# Altium PCB SmartSocket V1.0.PcbDoc (part 1 of 4)
Units mm, origin at the board's own origin, x right, y up, seen from the top; angles counter-clockwise.
Board outline 49.2 x 69.88 mm, 2 copper layers (Top Layer, Bottom Layer), stack 1.671 mm thick; 117 components, 80 nets, 371 pads, 48 vias.
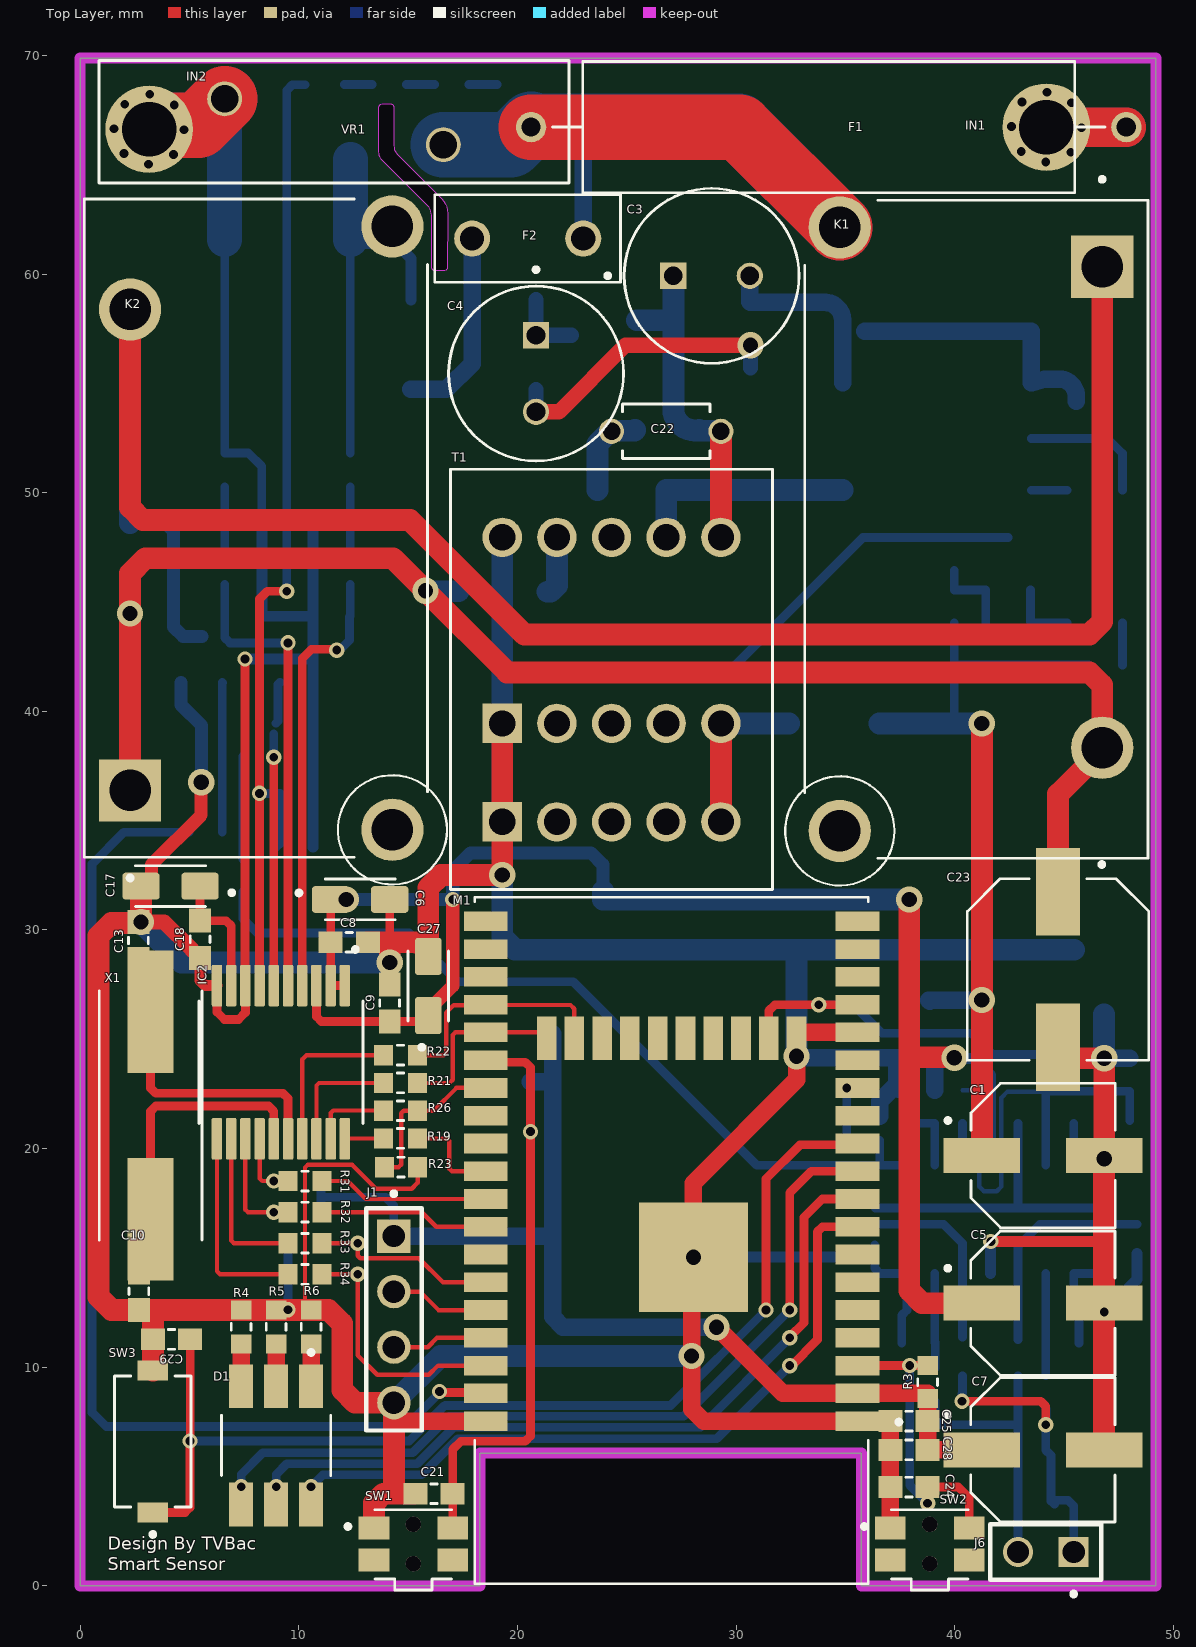
[diagram p0: Top Layer view]
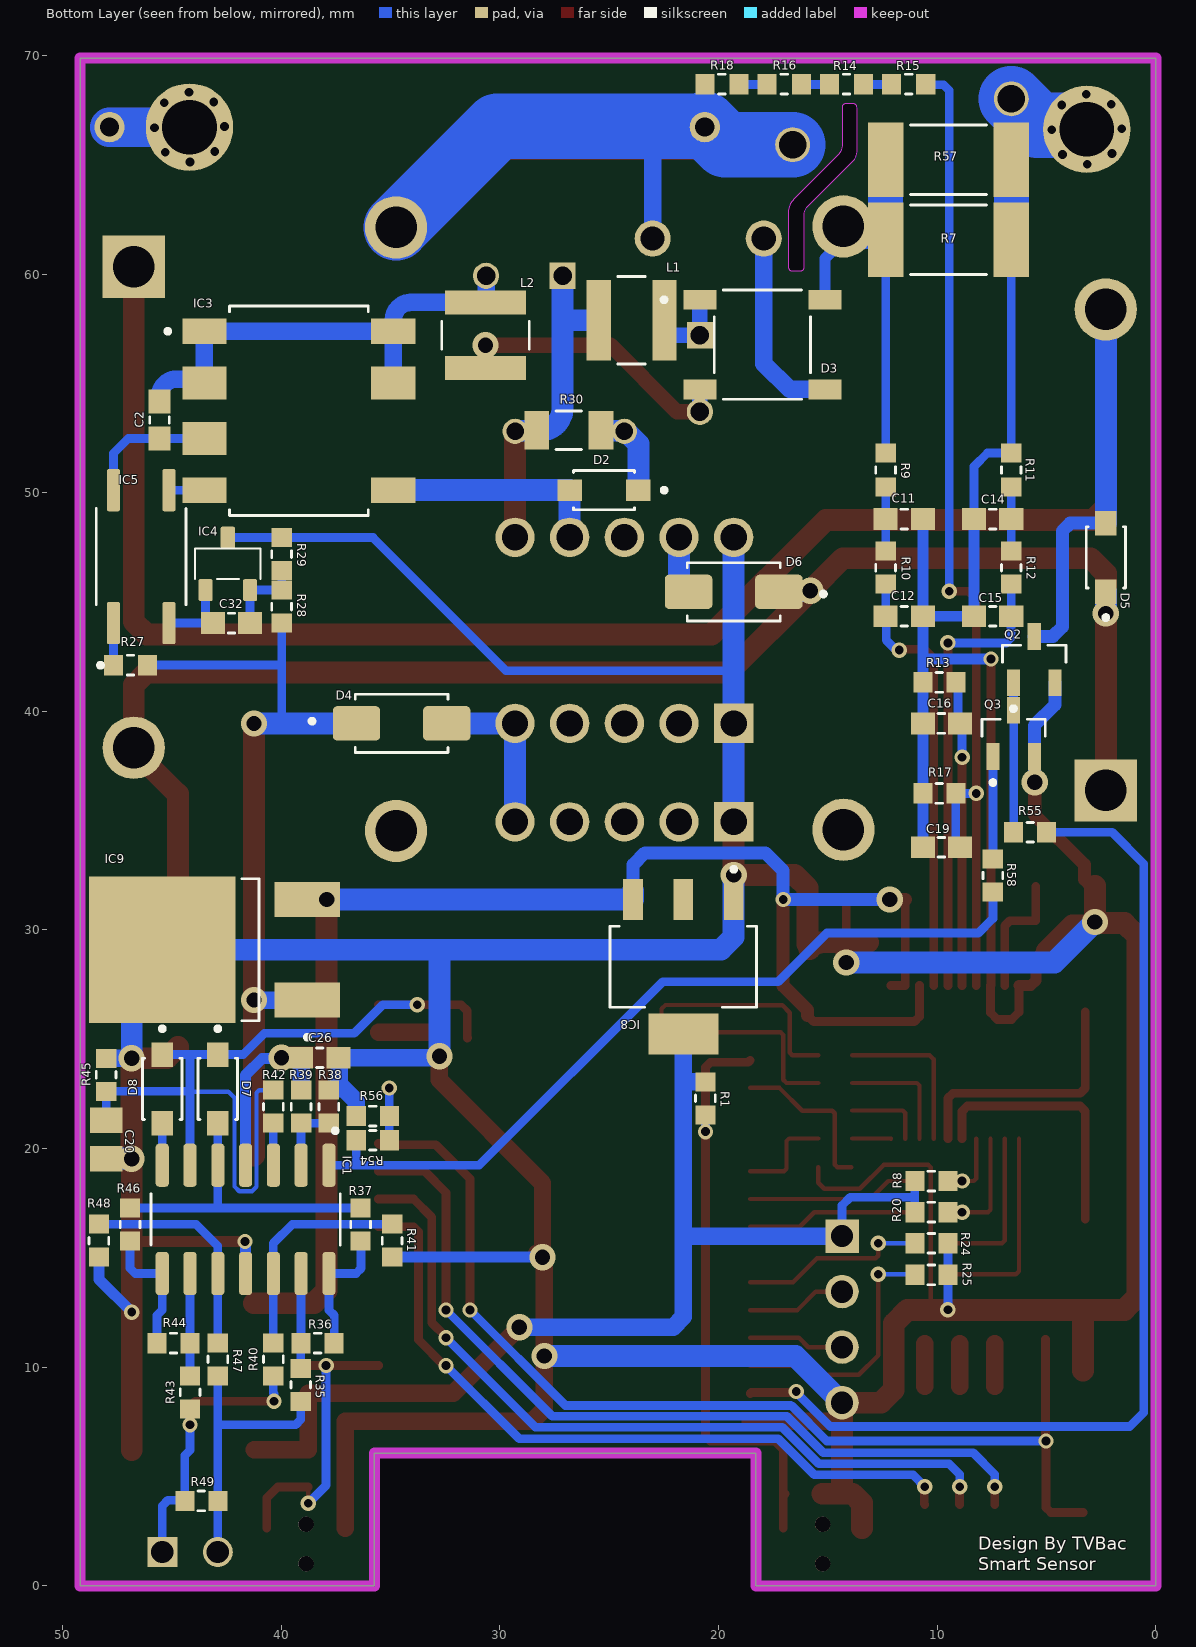
[diagram p1: Bottom Layer view, seen from below]

## Layer stack, top to bottom
Top Solder: solder mask 0.0102, Solder Resist, Dk 3.5
Top Layer: signal copper 0.0356
Dielectric 1: dielectric 1.6, FR-4, Dk 4.8
Bottom Layer: signal copper 0.0356
Bottom Solder: solder mask 0.0102, Solder Resist, Dk 3.5

## Board outline
0,0 0,69.875 49.2,69.875 49.2,0 35.738,0 35.738,6.071 18.288,6.071 18.288,0
cut-out: 13.843,67.793 14.173,67.793 cw(c14.173,67.615) 14.351,67.615 14.351,65.862 ccw(c14.903,65.862) 14.513,65.472 16.535,63.449 cw(c15.861,62.775) 16.815,62.775 16.815,62.687 16.806,62.678 cw(c16.637,60.316) 16.637,60.147 16.256,60.147 cw(c16.256,60.325) 16.078,60.325 16.078,62.687 ccw(c15.465,62.687) 15.899,63.121 13.827,65.193 cw(c14.217,65.583) 13.665,65.583 13.665,67.615 cw(c13.843,67.615)

## Design rules (kind name [scope] priority, off if disabled: settings)
Clearance [All] p1: gap=0.1 ignorepadtopadclearanceinfootprint=FALSE
ComponentClearance [All] p1: gap=0.1 collisioncheckmode=3 verticalgap=0.1 showdistances=FALSE
DiffPairsRouting [All] p1: maxlimit=0.2 minlimit=0.1 mostfreqgap=0.2 toplayer_minwidth=0.2 toplayer_maxwidth=1 toplayer_prefwidth=0.2 bottomlayer_minwidth=0.2 bottomlayer_maxwidth=1 bottomlayer_prefwidth=0.2 maxuncoupledlength=12.7
Height [All] p1: minheight=0 maxheight=40 prefheight=10
HoleToHoleClearance [InDrillLayerPair('Top Layer - Bottom Layer') vs InDrillLayerPair('Top Layer - Bottom Layer')] p1: gap=0.1 allowstackedmicrovias=TRUE
MinimumSolderMaskSliver [OnLayer('Top Layer') vs OnLayer('Bottom Layer')] p1: minsoldermaskwidth=0.1
PlaneConnect [All] p1: planeconnectstyle=Direct reliefexpansion=0.508 reliefentries=4 reliefconductorwidth=0.254 reliefairgap=0.254
PolygonConnect [All] p1: connectstyle=Direct reliefconductorwidth=0.254 reliefentries=4 polygonreliefangle="90 Angle" airgapwidth=0.254
RoutingVias [All] p1: holewidth=0.4 width=0.7 viastyle="Through Hole" minholewidth=0.4 minwidth=0.7 maxholewidth=3 maxwidth=4
SilkToSilkClearance [OnLayer('Top Overlay') vs OnLayer('Bottom Overlay')] p1: silktosilkclearance=0
SilkToSolderMaskClearance [OnLayer('Top Layer') vs OnLayer('Bottom Layer')] p1: minsilkscreentomaskgap=0.1 clearancetoexposedcopper=TRUE
SolderMaskExpansion [All] p1: expansion=0.102 istentingtop=FALSE
Width [All] p1: maxlimit=5 minlimit=0.15 preferedwidth=0.2
22 further rules are at their usual default settings.

## Classes and differential pairs
net class LV-HP: 3V3-ESP +5 NetC1_1 NetD4_2 NetIC8_2 NetU1_2 NetU1_3 NetU1_4 POWER_L
net class HV-HP: +12 CUR-SHT-1 NetC2_1 NetC22_1 NetD2_A NetD3_AC2 NetD5_A NetD6_2 NetF1_1 NetIC3_4 NetK1_NC NetK2_NC NetU1_8 POWER-300V POWER-300V-R POWER-GND POWER-GND-R POWER_L POWER_N
net class Analog: +5 CUR-SHT-1 NetC11_2 NetC12_2 NetC14_2 NetC15_2 NetC16_2 NetC17_1 NetC17_2 NetC19_2 NetR14_1 NetR14_2 NetR16_2 POWER_L POWER_N

## Components (designator, comment, footprint, x,y, rotation, side; value= is the part's Value field where it differs from the comment)
C1 "220 µF 16 V Aluminum - Polymer Capacitors Radial, Can - SMD 22mOhm 1000 Hrs @ 125°C" SMD-DxLxW-6.3x6.6x6.6-PEC 44.044,19.685 r0 top value=220uF
C2 "0.1 µF ±5% 50V Ceramic Capacitor X7R 0603 (1608 Metric)" SMD-CAP-0603-YAGEO 45.568,53.326 r90 bottom value=0.1uF
C3 "2.2 µF 400 V Aluminum Electrolytic Capacitors Radial, Can 2000 Hrs @ 85°C" TH-CAP-HxD-12.5x8.0-PEC 28.882,59.919 r0 top value=2.2uF
C4 "2.2 µF 400 V Aluminum Electrolytic Capacitors Radial, Can 2000 Hrs @ 85°C" TH-CAP-HxD-12.5x8.0-PEC 20.853,55.448 r270 top value=2.2uF
C5 "220 µF 16 V Aluminum - Polymer Capacitors Radial, Can - SMD 22mOhm 1000 Hrs @ 125°C" SMD-DxLxW-6.3x6.6x6.6-PEC 44.038,12.929 r0 top value=220uF
C6 "10 µF Molded Tantalum Capacitors 10 V 1206 (3216 Metric) 3.8Ohm" SMD-CAP-TAN-1206-KEMET 12.81,31.394 r0 top
C7 "220 µF 10 V Aluminum - Polymer Capacitors Radial, Can - SMD 20mOhm 2000 Hrs @ 105°C" SMD-DxLxW-6.3x6.6x6.6-PEC 44.038,6.223 r0 top value=220uF
C8 "0.1 µF ±10% 16V Ceramic Capacitor X7R 0603 (1608 Metric)" SMD-CAP-0603-YAGEO 12.31,29.439 r180 top value=0.1uF
C9 "0.1 µF ±10% 16V Ceramic Capacitor X7R 0603 (1608 Metric)" SMD-CAP-0603-YAGEO 14.16,26.658 r270 top value=0.1uF
C10 "22 pF ±1% 50V Ceramic Capacitor C0G, NP0 0603 (1608 Metric)" SMD-CAP-0603-YAGEO 2.692,13.476 r270 top value=22pF
C11 "0.033 µF ±5% 16V Ceramic Capacitor X7R 0603 (1608 Metric)" SMD-CAP-0603-KEMET 11.508,48.793 r0 bottom value=33nF
C12 "0.033 µF ±5% 16V Ceramic Capacitor X7R 0603 (1608 Metric)" SMD-CAP-0603-KEMET 11.508,44.348 r0 bottom value=33nF
C13 "22 pF ±1% 50V Ceramic Capacitor C0G, NP0 0603 (1608 Metric)" SMD-CAP-0603-YAGEO 2.667,29.515 r270 top value=22pF
C14 "0.033 µF ±5% 16V Ceramic Capacitor X7R 0603 (1608 Metric)" SMD-CAP-0603-KEMET 7.462,48.793 r180 bottom value=33nF
C15 "0.033 µF ±5% 16V Ceramic Capacitor X7R 0603 (1608 Metric)" SMD-CAP-0603-KEMET 7.462,44.348 r180 bottom value=33nF
C16 "0.033 µF ±5% 16V Ceramic Capacitor X7R 0603 (1608 Metric)" SMD-CAP-0603-KEMET 9.808,39.448 r180 bottom value=33nF
C17 "10 µF Molded Tantalum Capacitors 10 V 1206 (3216 Metric) 3.8Ohm" SMD-CAP-TAN-1206-KEMET 4.136,32.004 r180 top
C18 "0.1 µF ±10% 16V Ceramic Capacitor X7R 0603 (1608 Metric)" SMD-CAP-0603-YAGEO 5.486,29.575 r90 top value=0.1uF
C19 "0.033 µF ±5% 16V Ceramic Capacitor X7R 0603 (1608 Metric)" SMD-CAP-0603-KEMET 9.808,33.782 r180 bottom value=33nF
C20 "10 µF ±10% 6.3V Ceramic Capacitor X5R 0805 (2012 Metric)" SMD-CAP-0805-KEMET 48.006,20.415 r90 bottom value=10uF
C21 "0.1 µF ±5% 25V Ceramic Capacitor X7R 0603 (1608 Metric)" SMD-CAP-0603-YAGEO 16.19,4.216 r0 top value=0.1uF
C22 "1000 pF ±5% 50V Ceramic Capacitor C0G, NP0 Radial" TH-CAP-HxLxW-5.5x4.0x2.5-TDKC 26.808,52.807 r0 top value=1nF
C23 "220 µF 25 V Aluminum - Polymer Capacitors Radial, Can - SMD 27mOhm 10000 Hrs @ 105°C" SMD-DxLxW-8.0x8.3x8.3-PEC 44.729,28.194 r270 top value=220uF
C24 "0.1 µF ±5% 25V Ceramic Capacitor X7R 0603 (1608 Metric)" SMD-CAP-0603-YAGEO 37.912,4.521 r0 top value=0.1uF
C25 "0.1 µF ±10% 10V Ceramic Capacitor X7R 0603 (1608 Metric)" SMD-CAP-0603-YAGEO 37.912,7.534 r0 top value=0.01uF
C26 "0.1 µF ±10% 10V Ceramic Capacitor X7R 0603 (1608 Metric)" SMD-CAP-0603-YAGEO 38.241,24.155 r0 bottom value=0.01uF
C27 "10 µF Molded Tantalum Capacitors 10 V 1206 (3216 Metric) 3.8Ohm" SMD-CAP-TAN-1206-KEMET 15.926,27.437 r90 top
C28 "1 µF ±10% 16V Ceramic Capacitor X7R 0603 (1608 Metric)" SMD-CAP-0603-YAGEO 37.912,6.223 r0 top value=1uF
C29 "0.1 µF ±5% 25V Ceramic Capacitor X7R 0603 (1608 Metric)" SMD-CAP-0603-YAGEO 4.177,11.278 r0 top value=0.1uF
C32 "10000 pF ±5% 25V Ceramic Capacitor X7R 0603 (1608 Metric)" SMD-CAP-0603-YAGEO 42.273,44.034 r180 bottom value=0.01uF
D1 "Red, Green, Blue (RGB) 625nm Red, 525nm Green, 568nm Blue LED Indication - Discrete 2V Red, 3.2V Green, 3.3V Blue 6-SMD, J-Lead" SMD-HxLxW-1.6x5.0x5.0-ABOC 8.966,6.426 r270 top
D2 "Diode 1000 V 1A Surface Mount SOD-123FL" SOD-123FL-SMCDS 25.238,50.114 r0 bottom value=6pF
D3 "Bridge Rectifier Single Phase Standard 1 kV Surface Mount ABS" DIODE-SMD-4-TSC 17.993,56.769 r180 bottom
D4 "Diode 40 V 3A Surface Mount DO-214AC (SMA)" SMD-DO-214AC-214-CT 34.493,39.448 r180 bottom
D5 "Diode 1000 V 1A Surface Mount SOD-123FL" SOD-123FL-SMCDS 2.286,47.036 r90 bottom value=6pF
D6 "Diode 40 V 3A Surface Mount DO-214AC (SMA)" SMD-DO-214AC-214-CT 19.304,45.466 r0 bottom
D7 "Diode 1000 V 1A Surface Mount SOD-123FL" SOD-123FL-SMCDS 42.901,22.733 r270 bottom value=6pF
D8 "Diode 1000 V 1A Surface Mount SOD-123FL" SOD-123FL-SMCDS 45.441,22.733 r270 bottom value=6pF
F1 "20 A 600 V AC 500 V DC Fuse Cartridge, Ceramic Through Hole 5mm x 20mm (Axial)" FUSE-5mmx20mm-AXIAL-BFI 34.239,66.718 r180 top value=20A
F2 "1 A 300 V AC DC Fuse Board Mount (Cartridge Style Excluded) Through Hole Radial, Box" FUSE-HxLxW-8.0x8.5x4.0-LI 20.472,61.62 r180 top value=1A
IC1 "General Purpose Amplifier 4 Circuit 14-SOIC" SOIC-14 41.631,16.764 r270 bottom
IC2 "Single Phase Meter IC 20-SSOP" SSOP-20-ADI 9.185,23.952 r270 top
IC3 "Converter Offline Flyback Topology 132kHz SMD-8B" SMD-8B-PI 39.192,53.746 r180 bottom
IC4 "Shunt Voltage Reference IC Adjustable 2.495V 36 VV ±1% 100 mA SOT-23-3" SOT-23-3-DS 42.443,46.744 r90 bottom
IC5 "Optoisolator Transistor Output 3750Vrms 1 Channel 4-SOP (2.54mm)" SOP-4 46.406,47.074 r90 bottom
IC8 "Linear Voltage Regulator IC Positive Fixed 1 Output 1A SOT-223-3" SOT-223-3-DI 21.608,28.319 r270 bottom
IC9 "Linear Voltage Regulator IC Positive Fixed 1 Output 1A TO-252" TO252-3-RS 43.053,29.094 r0 bottom
IN1 "INPUT" INPUT-2.0x3.5 44.196,66.718 r0 top
IN2 "INPUT" INPUT-2.0x3.5 3.156,66.62 r0 top
J1 "Connector Header Through Hole 4 position 0.100\" (2.54mm)" HEADER-2.54-4 14.351,12.188 r270 top
J6 "Connector Header Through Hole 2 position" HEADER-2.54-2 44.171,1.549 r0 top
K1 "General Purpose Relay SPST-NO (1 Form A) 12VDC Coil Through Hole" RELAY-HxLxW-23.5x30.5x15.7-OEIEMCD-D 40.997,48.328 r90 top
K2 "General Purpose Relay SPST-NO (1 Form A) 12VDC Coil Through Hole" RELAY-HxLxW-23.5x30.5x15.7-OEIEMCD-D 8.036,48.379 r270 top locked
L1 "220 µH Shielded Drum Core, Wirewound Inductor 250 mA 3.84Ohm Max Nonstandard" SMD-HxLxW-1.8x4.0x4.0-ALLC 23.978,57.884 r0 bottom value=220uH
L2 "220 µH Shielded Drum Core, Wirewound Inductor 250 mA 3.84Ohm Max Nonstandard" SMD-HxLxW-1.8x4.0x4.0-ALLC 30.658,57.198 r90 bottom value=220uH
M1 "Bluetooth, WiFi 802.11b/g/n, Bluetooth v4.2 +EDR, Class 1, 2 and 3 Transceiver Module 2.4GHz ~ 2.5GHz Integrated, Trace Surface Mount" "MODULE-ESP32-WROVER - WROOM" 35.551,7.534 r180 top
Q2 "Bipolar (BJT) Transistor NPN 45 V 500 mA 100MHz 300 mW Surface Mount SOT-23-3 (TO-236)" SOT-23-3-ONSEMI 5.563,42.367 r90 bottom
Q3 "Bipolar (BJT) Transistor NPN 45 V 500 mA 100MHz 300 mW Surface Mount SOT-23-3 (TO-236)" SOT-23-3-ONSEMI 6.502,38.989 r90 bottom
R1 "10 kOhms ±1% 0.25W, 1/4W Chip Resistor 0603 (1608 Metric) Automotive AEC-Q200, Pulse Withstanding Thick Film" SMD-RES-0603-SEI 20.599,22.301 r90 bottom value=10k
R3 "10 kOhms ±1% 0.25W, 1/4W Chip Resistor 0603 (1608 Metric) Automotive AEC-Q200, Pulse Withstanding Thick Film" SMD-RES-0603-SEI 38.762,9.319 r270 top value=10k
R4 "100 Ohms ±1% 0.1W, 1/10W Chip Resistor 0603 (1608 Metric) Automotive AEC-Q200, High Voltage Thick Film" SMD-RES-0603-RS 7.366,11.846 r90 top value=100R
R5 "100 Ohms ±1% 0.1W, 1/10W Chip Resistor 0603 (1608 Metric) Automotive AEC-Q200, High Voltage Thick Film" SMD-RES-0603-RS 8.966,11.846 r90 top value=100R
R6 "100 Ohms ±1% 0.1W, 1/10W Chip Resistor 0603 (1608 Metric) Automotive AEC-Q200, High Voltage Thick Film" SMD-RES-0603-RS 10.566,11.846 r90 top value=100R
R7 "10 mOhms ±1% 3W Chip Resistor 2512 (6432 Metric) Automotive AEC-Q200, Current Sense, Moisture Resistant Metal Film" SMD-RES-2512-VD 9.485,61.57 r0 bottom value=10mR
R8 "10 kOhms ±1% 0.25W, 1/4W Chip Resistor 0603 (1608 Metric) Automotive AEC-Q200, Pulse Withstanding Thick Film" SMD-RES-0603-SEI 10.265,18.517 r180 bottom value=10k
R9 "100 Ohms ±1% 0.1W, 1/10W Chip Resistor 0603 (1608 Metric) Automotive AEC-Q200, High Voltage Thick Film" SMD-RES-0603-RS 12.358,51.036 r270 bottom value=100R
R10 "1 kOhms ±1% 0.25W, 1/4W Chip Resistor 0603 (1608 Metric) Automotive AEC-Q200, Pulse Withstanding Thick Film" SMD-RES-0603-SEI 12.358,46.568 r270 bottom value=1K
R11 "100 Ohms ±1% 0.1W, 1/10W Chip Resistor 0603 (1608 Metric) Automotive AEC-Q200, High Voltage Thick Film" SMD-RES-0603-RS 6.612,51.036 r270 bottom value=100R
R12 "1 kOhms ±1% 0.25W, 1/4W Chip Resistor 0603 (1608 Metric) Automotive AEC-Q200, Pulse Withstanding Thick Film" SMD-RES-0603-SEI 6.612,46.568 r270 bottom value=1K
R13 "1 kOhms ±1% 0.25W, 1/4W Chip Resistor 0603 (1608 Metric) Automotive AEC-Q200, Pulse Withstanding Thick Film" SMD-RES-0603-SEI 9.903,41.326 r180 bottom value=1K
R14 "300 kOhms ±1% 0.1W, 1/10W Chip Resistor 0603 (1608 Metric) Automotive AEC-Q200, High Voltage Thick Film" SMD-RES-0603-RS 14.148,68.682 r180 bottom value=300kR
R15 "300 kOhms ±1% 0.1W, 1/10W Chip Resistor 0603 (1608 Metric) Automotive AEC-Q200, High Voltage Thick Film" SMD-RES-0603-RS 11.303,68.682 r180 bottom value=300kR
R16 "300 kOhms ±1% 0.1W, 1/10W Chip Resistor 0603 (1608 Metric) Automotive AEC-Q200, High Voltage Thick Film" SMD-RES-0603-RS 16.993,68.682 r0 bottom value=300kR
R17 "1 kOhms ±1% 0.25W, 1/4W Chip Resistor 0603 (1608 Metric) Automotive AEC-Q200, Pulse Withstanding Thick Film" SMD-RES-0603-SEI 9.903,36.246 r180 bottom value=1K
R18 "300 kOhms ±1% 0.1W, 1/10W Chip Resistor 0603 (1608 Metric) Automotive AEC-Q200, High Voltage Thick Film" SMD-RES-0603-RS 19.847,68.682 r180 bottom value=300kR
R19 "100 Ohms ±1% 0.1W, 1/10W Chip Resistor 0603 (1608 Metric) Automotive AEC-Q200, High Voltage Thick Film" SMD-RES-0603-RS 14.656,20.463 r0 top value=100R
R20 "10 kOhms ±1% 0.25W, 1/4W Chip Resistor 0603 (1608 Metric) Automotive AEC-Q200, Pulse Withstanding Thick Film" SMD-RES-0603-SEI 10.265,17.094 r180 bottom value=10k
R21 "100 Ohms ±1% 0.1W, 1/10W Chip Resistor 0603 (1608 Metric) Automotive AEC-Q200, High Voltage Thick Film" SMD-RES-0603-RS 14.656,23.003 r0 top value=100R
R22 "100 Ohms ±1% 0.1W, 1/10W Chip Resistor 0603 (1608 Metric) Automotive AEC-Q200, High Voltage Thick Film" SMD-RES-0603-RS 14.656,24.273 r0 top value=100R
R23 "10 kOhms ±1% 0.25W, 1/4W Chip Resistor 0603 (1608 Metric) Automotive AEC-Q200, Pulse Withstanding Thick Film" SMD-RES-0603-SEI 14.681,19.152 r180 top value=10k
R24 "10 kOhms ±1% 0.25W, 1/4W Chip Resistor 0603 (1608 Metric) Automotive AEC-Q200, Pulse Withstanding Thick Film" SMD-RES-0603-SEI 10.265,15.672 r0 bottom value=10k
R25 "10 kOhms ±1% 0.25W, 1/4W Chip Resistor 0603 (1608 Metric) Automotive AEC-Q200, Pulse Withstanding Thick Film" SMD-RES-0603-SEI 10.265,14.224 r0 bottom value=10k
R26 "4.7 kOhms ±1% 0.1W, 1/10W Chip Resistor 0603 (1608 Metric) Anti-Sulfur Thick Film" SMD-RES-0603-RS 14.656,21.733 r0 top value=4.7K
R27 "100 Ohms ±1% 0.1W, 1/10W Chip Resistor 0603 (1608 Metric) Automotive AEC-Q200, High Voltage Thick Film" SMD-RES-0603-RS 46.896,42.113 r180 bottom value=100R
R28 "10 kOhms ±1% 0.25W, 1/4W Chip Resistor 0603 (1608 Metric) Automotive AEC-Q200, Pulse Withstanding Thick Film" SMD-RES-0603-SEI 39.98,44.789 r270 bottom value=10k
R29 "10 kOhms ±1% 0.25W, 1/4W Chip Resistor 0603 (1608 Metric) Automotive AEC-Q200, Pulse Withstanding Thick Film" SMD-RES-0603-SEI 39.98,47.189 r270 bottom value=10k
R30 "300 kOhms ±1% 0.5W, 1/2W Chip Resistor 1206 (3216 Metric) Automotive AEC-Q200, Pulse Withstanding Thick Film" SMD-RES-1206-RS 26.847,52.857 r0 bottom value=300kR
R31 "100 Ohms ±1% 0.1W, 1/10W Chip Resistor 0603 (1608 Metric) Automotive AEC-Q200, High Voltage Thick Film" SMD-RES-0603-RS 10.29,18.517 r0 top value=100R
R32 "100 Ohms ±1% 0.1W, 1/10W Chip Resistor 0603 (1608 Metric) Automotive AEC-Q200, High Voltage Thick Film" SMD-RES-0603-RS 10.29,17.094 r0 top value=100R
R33 "4.7 kOhms ±1% 0.1W, 1/10W Chip Resistor 0603 (1608 Metric) Anti-Sulfur Thick Film" SMD-RES-0603-RS 10.29,15.672 r0 top value=4.7K
R34 "4.7 kOhms ±1% 0.1W, 1/10W Chip Resistor 0603 (1608 Metric) Anti-Sulfur Thick Film" SMD-RES-0603-RS 10.29,14.249 r0 top value=4.7K
R35 "1 kOhms ±1% 0.25W, 1/4W Chip Resistor 0603 (1608 Metric) Automotive AEC-Q200, Pulse Withstanding Thick Film" SMD-RES-0603-SEI 39.108,9.198 r90 bottom value=1K
R36 "100 kOhms ±5% 0.25W, 1/4W Chip Resistor 0603 (1608 Metric) Automotive AEC-Q200, Pulse Withstanding Thick Film" SMD-RES-0603-SEI 38.336,11.1 r180 bottom value=100K
R37 "1 kOhms ±1% 0.25W, 1/4W Chip Resistor 0603 (1608 Metric) Automotive AEC-Q200, Pulse Withstanding Thick Film" SMD-RES-0603-SEI 36.373,16.532 r90 bottom value=1K
R38 "1 kOhms ±1% 0.25W, 1/4W Chip Resistor 0603 (1608 Metric) Automotive AEC-Q200, Pulse Withstanding Thick Film" SMD-RES-0603-SEI 37.821,21.918 r270 bottom value=1K
R39 "10 kOhms ±1% 0.25W, 1/4W Chip Resistor 0603 (1608 Metric) Automotive AEC-Q200, Pulse Withstanding Thick Film" SMD-RES-0603-SEI 39.091,21.918 r90 bottom value=10k
R40 "1 kOhms ±1% 0.25W, 1/4W Chip Resistor 0603 (1608 Metric) Automotive AEC-Q200, Pulse Withstanding Thick Film" SMD-RES-0603-SEI 40.361,10.363 r90 bottom value=1K
R41 "100 kOhms ±5% 0.25W, 1/4W Chip Resistor 0603 (1608 Metric) Automotive AEC-Q200, Pulse Withstanding Thick Film" SMD-RES-0603-SEI 34.925,15.789 r270 bottom value=100K
R42 "1 kOhms ±1% 0.25W, 1/4W Chip Resistor 0603 (1608 Metric) Automotive AEC-Q200, Pulse Withstanding Thick Film" SMD-RES-0603-SEI 40.361,21.918 r270 bottom value=1K
R43 "1 kOhms ±1% 0.25W, 1/4W Chip Resistor 0603 (1608 Metric) Automotive AEC-Q200, Pulse Withstanding Thick Film" SMD-RES-0603-SEI 44.171,8.853 r90 bottom value=1K
R44 "100 kOhms ±5% 0.25W, 1/4W Chip Resistor 0603 (1608 Metric) Automotive AEC-Q200, Pulse Withstanding Thick Film" SMD-RES-0603-SEI 44.926,11.1 r0 bottom value=100K
R45 "100 kOhms ±5% 0.25W, 1/4W Chip Resistor 0603 (1608 Metric) Automotive AEC-Q200, Pulse Withstanding Thick Film" SMD-RES-0603-SEI 48.006,23.375 r270 bottom value=100K
R46 "1 kOhms ±1% 0.25W, 1/4W Chip Resistor 0603 (1608 Metric) Automotive AEC-Q200, Pulse Withstanding Thick Film" SMD-RES-0603-SEI 46.914,16.532 r90 bottom value=1K
R47 "1 kOhms ±1% 0.25W, 1/4W Chip Resistor 0603 (1608 Metric) Automotive AEC-Q200, Pulse Withstanding Thick Film" SMD-RES-0603-SEI 42.901,10.363 r90 bottom value=1K
R48 "100 kOhms ±5% 0.25W, 1/4W Chip Resistor 0603 (1608 Metric) Automotive AEC-Q200, Pulse Withstanding Thick Film" SMD-RES-0603-SEI 48.336,15.789 r270 bottom value=100K
R49 "1 kOhms ±1% 0.25W, 1/4W Chip Resistor 0603 (1608 Metric) Automotive AEC-Q200, Pulse Withstanding Thick Film" SMD-RES-0603-SEI 43.656,3.886 r0 bottom value=1K
R54 "1 kOhms ±1% 0.25W, 1/4W Chip Resistor 0603 (1608 Metric) Automotive AEC-Q200, Pulse Withstanding Thick Film" SMD-RES-0603-SEI 35.814,20.382 r180 bottom value=1K
R55 "1 kOhms ±1% 0.25W, 1/4W Chip Resistor 0603 (1608 Metric) Automotive AEC-Q200, Pulse Withstanding Thick Film" SMD-RES-0603-SEI 5.747,34.468 r0 bottom value=1K
R56 "1 kOhms ±1% 0.25W, 1/4W Chip Resistor 0603 (1608 Metric) Automotive AEC-Q200, Pulse Withstanding Thick Film" SMD-RES-0603-SEI 35.814,21.488 r180 bottom value=1K
R57 "10 mOhms ±1% 3W Chip Resistor 2512 (6432 Metric) Automotive AEC-Q200, Current Sense, Moisture Resistant Metal Film" SMD-RES-2512-VD 9.485,65.227 r0 bottom value=10mR
R58 "1 kOhms ±1% 0.25W, 1/4W Chip Resistor 0603 (1608 Metric) Automotive AEC-Q200, Pulse Withstanding Thick Film" SMD-RES-0603-SEI 7.452,32.487 r90 bottom value=1K
SW1 "https://www.digikey.com/en/products/detail/panasonic-electronic-components/EVQ-P7L01P/4429453" SW-HxLxW-1.1x3.5x2.9-PEC 15.24,1.916 r0 top
SW2 "https://www.digikey.com/en/products/detail/panasonic-electronic-components/EVQ-P7L01P/4429453" SW-HxLxW-1.1x3.5x2.9-PEC 38.862,1.916 r0 top
SW3 "Tactile Switch SPST-NO Top Actuated Surface Mount" SW-HxLxW-5.0x6.0x3.5-C&K 3.327,6.604 r90 top
T1 "For SMPS Transformer 500VAC Isolation Through Hole" "EE13 - POWER" 24.308,41.453 r90 top
VR1 "470 V 8 kA Varistor 1 Circuit Through Hole Disc 20mm" VARISTOR-ETE 11.612,66.963 r0 top
X1 "3.579545 MHz ±20ppm Crystal 18pF 180 Ohms HC-49/US" SMD-HC-49/US-ALLC 3.226,21.514 r270 top value=3.58M

## Footprints (in the part's own frame and the unit in brackets; to place one, negate y for a bottom-side part, rotate by r counter-clockwise, add the part's x,y. Pads: shape width x height; smd on the part's side, far side on the other; paste and mask are expansions set on the pad)
DIODE-SMD-4-TSC [mm]
  rect 1.5x0.9 smd: AC1(2.86,2.05) AC2(2.86,-2.05) NEG(-2.86,-2.05) POS(-2.86,2.05)
  silkscreen extent -4.6,-2.5 2.2,2.5, body extent -3.22,-2.5 3.22,2.5, height 1.6
"EE13 - POWER" [mm]
  rect 1.8x1.8 / inner round 1.8 / far side rect 1.8x1.8 hole 1.2: 1(-6.505,5) 1(-2.005,5)
  round 1.8 hole 1.2: 2(-6.505,2.5) 2(-2.005,2.5) 3(-6.505,0) 3(-2.005,0) 4(-6.505,-2.5) 4(-2.005,-2.5) 5(-6.505,-5) 5(-2.005,-5) 6(6.505,-5) 7(6.505,-2.5) 8(6.505,0) 9(6.505,2.5) 10(6.505,5)
  silkscreen extent -9.6,-7.36 9.61,7.36, body extent -9.62,-7.37 9.62,7.37, height 15.24
FUSE-5mmx20mm-AXIAL-BFI [mm]
  round 1.388 hole 0.88: 1(-13.613,0) 2(13.613,0)
  silkscreen extent -12.63,-3 12.63,3, body extent -13.94,-3 13.94,3, height 8.54
FUSE-HxLxW-8.0x8.5x4.0-LI [mm]
  round 1.65 hole 1.1: 1(-2.54,0) 2(2.54,0)
  silkscreen extent -4.25,-2 4.25,2, body extent -4.19,-1.99 4.32,1.99, height 7.49
HEADER-2.54-2 [mm]
  rect 1.37x1.37 hole 1.02: 01(1.27,0)
  round 1.37 hole 1.02: 02(-1.27,0)
  silkscreen extent -2.54,-2.02 2.54,1.27, body extent -2.54,-1.27 2.54,1.27, height 10.62
HEADER-2.54-4 [mm]
  rect 1.53x1.53 / inner round 1.53 / far side rect 1.53x1.53 hole 1.02: 01(-3.81,0)
  round 1.53 hole 1.02: 02(-1.27,0) 03(1.27,0) 04(3.81,0)
  silkscreen extent -5.85,-1.27 5.08,1.27, body extent -5.21,-1.27 5.08,1.27, height 8.38
INPUT-2.0x3.5 [mm]
  round 0.7 hole 0.4: 1(-1.6,0.025) 1(-1.149,-1.114) 1(-1.114,1.149) 1(-0.025,-1.6) 1(0.025,1.6) 1(1.114,-1.149) 1(1.149,1.114) 1(1.6,-0.025)
  round 4 hole 2.5: 1(0,0)
"MODULE-ESP32-WROVER - WROOM" [mm]
  rect 2x0.9 smd: 1(0,0) 2(0,-1.27) 3(0,-2.54) 4(0,-3.81) 5(0,-5.08) 6(0,-6.35) 7(0,-7.62) 8(0,-8.89) 9(0,-10.16) 10(0,-11.43) 11(0,-12.7) 12(0,-13.97) 13(0,-15.24) 14(0,-16.51) 15(0,-17.78) 16(0,-19.05) 17(0,-20.32) 18(0,-21.59) 19(0,-22.86) 20(17,-22.86) 21(17,-21.59) 22(17,-20.32) 23(17,-19.05) 24(17,-17.78) 25(17,-16.51) 26(17,-15.24) 27(17,-13.97) 28(17,-12.7) 29(17,-11.43) 30(17,-10.16) 31(17,-8.89) 32(17,-7.62) 33(17,-6.35) 34(17,-5.08) 35(17,-3.81) 36(17,-2.54) 37(17,-1.27) 38(17,0)
  rect 0.9x2 smd: 15(2.785,-17.51) 16(4.055,-17.51) 17(5.325,-17.51) 18(6.595,-17.51) 19(7.865,-17.51) 20(9.135,-17.51) 21(10.405,-17.51) 22(11.675,-17.51) 23(12.945,-17.51) 24(14.215,-17.51)
  rect 5x5 smd paste-1.835 mask-1.835: 39(7.5,-7.5)
  silkscreen extent -2,-23.96 17.5,7.44, body extent -0.5,-23.96 17.5,7.44, height 3.4
RELAY-HxLxW-23.5x30.5x15.7-OEIEMCD-D [mm]
  rect 2.85x2.85 / inner round 2.85 / far side rect 2.85x2.85 hole 1.9: 1(12,-5.75)
  round 2.85 hole 1.9: 2(-10,-5.75) 3(-13.8,6.25) 4(13.8,6.25)
  silkscreen extent -15.05,-7.85 16.1,7.85, body extent -15.25,-8 15.25,8, height 33.5
SMD-8B-PI [mil]
  rect 80x46 smd: 1(-170,143) 4(-170,-143) 5(170,-143) 8(170,143)
  rect 80x60 smd: 2(-170,50) 3(-170,-50) 7(170,50)
  silkscreen extent -240,-189 125,189, body extent -190,-188 190,188, height 157
SMD-CAP-0603-KEMET [mm]
  rect 1.1x1 smd: 1(-0.85,0) 2(0.85,0)
  silkscreen extent -0.15,-0.45 0.15,0.45, body extent -0.8,-0.4 0.8,0.4, height 0.87
SMD-CAP-0603-YAGEO [mm]
  rect 1.1x1 smd: 1(-0.85,0) 2(0.85,0)
  silkscreen extent -0.15,-0.45 0.15,0.45, body extent -0.8,-0.4 0.8,0.4, height 0.9
SMD-CAP-0805-KEMET [mm]
  rect 1.16x1.47 smd: 1(-0.875,0) 2(0.875,0)
  body extent -1.02,-0.64 1.02,0.64, height 1.4
SMD-CAP-TAN-1206-KEMET [mm]
  rrect25% 1.71x1.23 smd: 1(-1.35,0) 2(1.35,0)
  silkscreen extent -2.9,-0.93 1.6,0.93, body extent -1.6,-0.8 1.6,0.8, height 1.8
SMD-DO-214AC-214-CT [mm]
  rrect25% 2.17x1.57 smd: 1(-2.065,0) 2(2.065,0)
  silkscreen extent -4.2,-1.33 2.12,1.33, body extent -2.47,-1.25 2.47,1.25, height 2.2
SMD-DxLxW-6.3x6.6x6.6-PEC [mm]
  rect 3.5x1.6 smd: 1(-2.8,0) 2(2.8,0)
  silkscreen extent -4.45,-3.3 3.3,3.3, body extent -3.65,-3.3 3.65,3.3, height 5.9
SMD-DxLxW-8.0x8.3x8.3-PEC [mm]
  rect 4x2 smd: 1(-3.55,0) 2(3.55,0)
  silkscreen extent -4.9,-4.15 4.15,4.15, body extent -4.85,-4.15 4.85,4.15, height 10.2
SMD-HC-49/US-ALLC [mm]
  rect 5.6x2.1 smd: 1(-4.75,0) 2(4.75,0)
  silkscreen extent -5.7,-2.35 5.7,2.35, body extent -6.35,-2.35 6.35,2.35, height 4.06
SMD-HxLxW-1.6x5.0x5.0-ABOC [mm]
  rect 2x1.1 smd: 1(-2.7,1.6) 2(-2.7,0) 3(-2.7,-1.6) 4(2.7,-1.6) 5(2.7,0) 6(2.7,1.6)
  silkscreen extent -4.35,-2.5 1.38,2.5, body extent -2.7,-2.5 2.7,2.5, height 1.6
SMD-HxLxW-1.8x4.0x4.0-ALLC [mm]
  rect 1.1x3.7 smd: 1(-1.5,0) 2(1.5,0)
  silkscreen extent -0.63,-2 0.63,2, body extent -2,-2 2,2, height 2.15
SMD-RES-0603-RS [mm]
  rect 0.87x0.93 smd: 1(-0.78,0) 2(0.78,0)
  silkscreen extent -0.15,-0.45 0.15,0.45, body extent -0.8,-0.4 0.8,0.4, height 0.55
SMD-RES-0603-SEI [mm]
  rect 0.87x0.93 smd: 1(-0.755,0) 2(0.755,0)
  silkscreen extent -0.15,-0.45 0.15,0.45, body extent -0.85,-0.47 0.85,0.47, height 0.56
SMD-RES-1206-RS [mm]
  rect 1.13x1.77 smd: 1(-1.47,0) 2(1.47,0)
  silkscreen extent -0.58,-0.88 0.58,0.88, body extent -1.6,-0.8 1.6,0.8, height 0.65
SMD-RES-2512-VD [mm]
  rect 1.62x3.4 smd: 1(-2.873,0) 2(2.873,0)
  silkscreen extent -1.74,-1.59 1.74,1.59, body extent -3.15,-1.58 3.15,1.58, height 0.7
SOD-123FL-SMCDS [mm]
  rect 1.12x0.99 smd: A(1.57,0) K(-1.57,0)
  silkscreen extent -2.85,-0.9 1.4,0.9, body extent -1.8,-0.9 1.8,0.9, height 1.1
SOIC-14 [mm]
  rrect50% 1.97x0.6 smd: 1(-2.475,3.81) 2(-2.475,2.54) 3(-2.475,1.27) 4(-2.475,0) 5(-2.475,-1.27) 6(-2.475,-2.54) 7(-2.475,-3.81) 8(2.475,-3.81) 9(2.475,-2.54) 10(2.475,-1.27) 11(2.475,0) 12(2.475,1.27) 13(2.475,2.54) 14(2.475,3.81)
  silkscreen extent -4.15,-4.33 1.17,4.33, body extent -3,-4.33 3,4.33, height 1.75
SOP-4 [mm]
  rrect25% 1.93x0.59 smd: 1(-3.04,1.27) 2(-3.04,-1.27) 3(3.04,-1.27) 4(3.04,1.27)
  silkscreen extent -5.07,-2.05 2.2,2.05, body extent -3.5,-2.05 3.5,2.05, height 2
SOT-23-3-DS [mm]
  rrect25% 1x0.65 smd: 1(-1.2,1.02) 2(-1.2,-1.02) 3(1.2,0)
  silkscreen extent -0.7,-1.5 0.7,1.5, body extent -1.18,-1.46 1.18,1.46, height 1.12
SOT-23-3-ONSEMI [mm]
  rect 1.23x0.6 smd: 1(-1.06,0.95) 2(-1.06,-0.95) 3(1.06,0)
  silkscreen extent -2.35,-1.45 0.65,1.45, body extent -1.18,-1.46 1.18,1.46, height 1.11
SOT-223-3-DI [mm]
  rect 1.86x0.9 smd: 1(-3.075,2.3) 2(-3.075,0) 3(-3.075,-2.3)
  rect 1.86x3.19 smd: 4(3.075,0)
  silkscreen extent -4.55,-3.35 1.85,3.35, body extent -3.5,-3.25 3.5,3.25, height 1.65
SSOP-20-ADI [mm]
  rrect25% 1.9x0.48 smd: 1(-3.505,2.925) 2(-3.505,2.275) 3(-3.505,1.625) 4(-3.505,0.975) 5(-3.505,0.325) 6(-3.505,-0.325) 7(-3.505,-0.975) 8(-3.505,-1.625) 9(-3.505,-2.275) 10(-3.505,-2.925) 11(3.505,-2.925) 12(3.505,-2.275) 13(3.505,-1.625) 14(3.505,-0.975) 15(3.505,-0.325) 16(3.505,0.325) 17(3.505,0.975) 18(3.505,1.625) 19(3.505,2.275) 20(3.505,2.925)
  silkscreen extent -5.25,-3.75 2.8,3.75, body extent -3.9,-3.6 3.9,3.6, height 2
SW-HxLxW-1.1x3.5x2.9-PEC [mm]
  rect 1.4x1.05 smd: 11(-1.8,0.725) 12(1.8,0.725) 21(-1.8,-0.725) 22(1.8,-0.725)
  round 0.7 hole 0.7 unplated: ""(0,-0.9) ""(0,0.9)
  silkscreen extent -3.09,-2.1 1.75,1.57, body extent -2.35,-2.1 2.35,1.59, height 1.5
SW-HxLxW-5.0x6.0x3.5-C&K [mm]
  rect 0.9x1.4 smd: 1(-3.25,0) 2(3.25,0)
  silkscreen extent -4.35,-1.75 3,1.75, body extent -3.55,-1.75 3.55,1.75, height 4.3
TH-CAP-HxD-12.5x8.0-PEC [mm]
  rect 1.2x1.2 hole 0.85: 1(-1.75,0)
  round 1.2 hole 0.85: 2(1.75,0)
  silkscreen extent -4.85,-4 4,4, body extent -4,-4 4,4, height 11.5
TH-CAP-HxLxW-5.5x4.0x2.5-TDKC [mm]
  round 1.15 hole 0.8: 1(-2.5,0) 2(2.5,0)
  silkscreen extent -2,-1.25 2,1.25, body extent -2.75,-1.25 2.75,1.25, height 5.5
TO252-3-RS [mm]
  rect 3x1.6 smd: 1(-4.25,2.3) 3(-4.25,-2.3)
  rect 6.7x6.7 smd paste-2.645: 2(2.4,0)
  silkscreen extent -4.35,-3.25 -1.26,4.1, body extent -4.72,-3.25 5,3.25, height 2.4
VARISTOR-ETE [mm]
  round 1.6 hole 1.25: 1(-5,1.05) 2(5,-1.05)
  silkscreen extent -10.75,-2.8 10.75,2.8, body extent -10.75,-2.7 10.75,2.7, height 26.5

## Part data
C1 C5: library part "CAP; 220uF; 16V; SMD; 16SVPK220M", "Cap Aluminum Polymer 220uF 16VDC 20% (6.3 X 5.9mm) SMD 0.022 Ohm 1040mA 1000h 125C T/R", Case/Package=Radial, ESR (Equivalent Series Resistance)=22mR, Leakage Current=704uA, Manufacturer=Panasonic, Manufacturer Part Number=16SVPK220M, Max Operating Temperature=125°C, Min Operating Temperature=-55°C, Ripple Current=3.3A, Supplier Part Number=667-16SVPK220M, Tolerance=20%, Voltage Rating=16V, Category="Polymer Capacitors", ComponentLink1Description=https://industrial.panasonic.com/cdbs/www-data/pdf/AAB8000/AAB8000C226.pdf?src-supplier=Digikey, ComponentLink1URL=https://industrial.panasonic.com/cdbs/www-data/pdf/AAB8000/AAB8000C226.pdf?src-supplier=Digikey, ComponentLink2Description=https://datasheet.octopart.com/16SVPK220M-Panasonic-datasheet-136612383.pdf?src-supplier=Element14, ComponentLink2URL=https://datasheet.octopart.com/16SVPK220M-Panasonic-datasheet-136612383.pdf?src-supplier=Element14, ComponentLink3Description=https://datasheet.octopart.com/16SVPK220M-Panasonic-datasheet-142271499.pdf?src-supplier=Electro+Sonic, ComponentLink3URL=https://datasheet.octopart.com/16SVPK220M-Panasonic-datasheet-142271499.pdf?src-supplier=Electro+Sonic, ComponentLink4Description=https://datasheet.octopart.com/16SVPK220M-Panasonic-datasheet-151949914.pdf?src-supplier=TME, ComponentLink4URL=https://datasheet.octopart.com/16SVPK220M-Panasonic-datasheet-151949914.pdf?src-supplier=TME, ComponentLink5Description="Link Digikey", ComponentLink5URL=https://www.digikey.com/en/products/detail/panasonic-electronic-components/16SVPK220M/9765095, Designer=TVBac, Dissipation Factor=12%, Height=6mm, Material=Polymer, Mounting Technology="Surface Mount", Packaging="Cut Tape", Pricing="1=1.29, 10=0.794, 50=0.794, 100=0.723, 1000=0.489, 10000=0.45 (USD)", RoHS=Yes, Series="OS-CON™, SVPK", Stock=2355, Supplier=Mouser, Voltage Rating (DC)=16V
C2: library part "CAP; 0.1uF; 50V; 0603; SMD; CC0603JRX7R9BB104", "Multilayer Ceramic Capacitor, 0.1 uF, 50 V, ï¿½ 5%, X7R, 0603 [1608 Metric]", Manufacturer=Yageo, Manufacturer Part Number=CC0603JRX7R9BB104, Supplier Part Number=311-1779-1-ND, Category="Ceramic Capacitors", ComponentLink1Description=https://datasheet.ciiva.com/11465/upy-gphc-x7r-6-3v-to-50v-8-11465038.pdf?src-supplier=Avnet, ComponentLink1URL=https://datasheet.ciiva.com/11465/upy-gphc-x7r-6-3v-to-50v-8-11465038.pdf?src-supplier=Avnet, ComponentLink2Description="Link Digikey", ComponentLink2URL=https://www.digikey.com/en/products/detail/yageo/CC0603JRX7R9BB104/5195188, Designer=TVBac, Halogen Free=5694HalogenFree, Lead Free=5697LeadFree, Material=4241ConductorMaterial, Pins=2NUMBER, Pricing="1=0.1, 10=0.07, 50=0.04, 100=0.031, 500=0.02334, 1000=0.01833, 4000=0.01533, 8000=0.014, 12000=0.01333, 28000=0.01267, 100000=0.00917, 200000=0.00887, 400000=0.00833 (USD)", RoHS=Yes, Stock=376318, Supplier=Digikey
C3 C4: library part "CAP; TH; 2.2uF; 400V; ECA-2GM2R2", "Cap Aluminum Lytic 2.2uF 400V 20% (8 X 11.5mm) Radial 3.5mm 50mA 2000h 85C Automotive Bulk", Manufacturer=Panasonic, Manufacturer Part Number=ECA-2GM2R2, Supplier Part Number=667-ECA-2GM2R2, Category="Aluminum Electrolytic Capacitors", ComponentLink1Description=https://datasheet.ciiva.com/48522/radial-m-eng-tds-48522426.pdf?src-supplier=Distrelec, ComponentLink1URL=https://datasheet.ciiva.com/48522/radial-m-eng-tds-48522426.pdf?src-supplier=Distrelec, ComponentLink2Description="Link Digikey", ComponentLink2URL=https://www.digikey.com/en/products/detail/panasonic-electronic-components/ECA-2GM2R2/2688912, Designer=TVBac, Lead Free=5697LeadFree, Pins=2NUMBER, Pricing="1=0.45, 10=0.221, 50=0.221, 100=0.142, 1000=0.119, 10000=0.096 (USD)", RoHS=Yes, Stock=1247, Supplier=Mouser
C6 C17 C27: library part "CAP; CAP_TAN; 10uF; 10V; T491A106M010AT", "Capacitor, Tantalum, Solid, Polarized, 10 V, 10 Uf, Surface Mount, 1206, Lead Free", Case Code (Imperial)=1206, Case Code (Metric)=3216, Dielectric Material=Tantalum, ESR (Equivalent Series Resistance)=4R, Leakage Current=1uA, Manufacturer=KEMET, Manufacturer Part Number=T491A106M010AT, Max Operating Temperature=125°C, Min Operating Temperature=-55°C, Ripple Current=137mA, Supplier Part Number=80-T491A106M010, Tolerance=20%, Voltage=10V, Case/Package=1206, Category="Tantalum Capacitors", ComponentLink1Description=https://datasheet.ciiva.com/27052/1573273-27052561.pdf?src-supplier=Jameco, ComponentLink1URL=https://datasheet.ciiva.com/27052/1573273-27052561.pdf?src-supplier=Jameco, ComponentLink2Description=https://datasheet.ciiva.com/257/kem-t2005-t491-257587.pdf?src-supplier=Digikey, ComponentLink2URL=https://datasheet.ciiva.com/257/kem-t2005-t491-257587.pdf?src-supplier=Digikey, ComponentLink3Description=https://datasheet.ciiva.com/7668/kem-t2005-t491-7668140.pdf?src-supplier=Element14, ComponentLink3URL=https://datasheet.ciiva.com/7668/kem-t2005-t491-7668140.pdf?src-supplier=Element14, ComponentLink4Description=https://datasheet.ciiva.com/257/kem-t2005-t491-257588.pdf?src-supplier=Digikey, ComponentLink4URL=https://datasheet.ciiva.com/257/kem-t2005-t491-257588.pdf?src-supplier=Digikey, ComponentLink5Description=https://datasheet.ciiva.com/257/kem-t2005-t491-257589.pdf?src-supplier=Digikey, ComponentLink5URL=https://datasheet.ciiva.com/257/kem-t2005-t491-257589.pdf?src-supplier=Digikey, ComponentLink6Description=https://datasheet.ciiva.com/14601/70095774-14601994.pdf?src-supplier=Allied+Electronics, ComponentLink6URL=https://datasheet.ciiva.com/14601/70095774-14601994.pdf?src-supplier=Allied+Electronics, ComponentLink7Description=https://datasheet.ciiva.com/14602/70095774-14602172.pdf?src-supplier=Allied+Electronics, ComponentLink7URL=https://datasheet.ciiva.com/14602/70095774-14602172.pdf?src-supplier=Allied+Electronics, ComponentLink8Description=https://datasheet.ciiva.com/12910/kem-t2005-t491-12910559.pdf?src-supplier=Mouser, ComponentLink8URL=https://datasheet.ciiva.com/12910/kem-t2005-t491-12910559.pdf?src-supplier=Mouser, ComponentLink9Description="Link Digikey", ComponentLink9URL=https://www.digikey.com/en/products/detail/kemet/T491A106M010AT/818547, Construction=Flat, Depth=1.6mm, Designer=TVBac, Dissipation Factor=6%, Features="General Purpose", Height=1.6mm, Lead Free="Lead Free", Lead Pitch=1.2mm, Length=3.2mm, Mounting Technology="Surface Mount,PCB", Packaging="Tape and Reel", Pins=2, Polarity=Polar, Pricing="1=0.29, 10=0.152, 50=0.152, 100=0.098, 1000=0.083, 2000=0.076, 10000=0.071, 50000=0.069 (USD)", Reach SVHC Compliant=No, RoHS=Yes, RoHS Compliant=Yes, Series=T491, Size=1.6mm, Stock=78299, Supplier=Mouser, Termination=SMD/SMT, Voltage Rating=10V, Voltage Rating (DC)=10V, Weight=0.000571oz, Width=1.6mm
C7: library part "CAP; 220uF; 10V; SMD; 10SVPE220M", "Cap Aluminum Polymer 220uF 10VDC 20%( 6.3 X 5.9mm) SMD 0.02 Ohm 2700mA 2000h 105C T/R", Case/Package=Radial, ESR (Equivalent Series Resistance)=20mR, Leakage Current=500uA, Manufacturer=Panasonic, Manufacturer Part Number=10SVPE220M, Max Operating Temperature=105°C, Min Operating Temperature=-55°C, Package Quantity=1000, Ripple Current=2.7A, Supplier Part Number=667-10SVPE220M, Tolerance=20%, Voltage=10V, Category="Polymer Capacitors", ComponentLink1Description=https://datasheet.ciiva.com/25767/1734359-25767468.pdf?src-supplier=Farnell, ComponentLink1URL=https://datasheet.ciiva.com/25767/1734359-25767468.pdf?src-supplier=Farnell, ComponentLink2Description=https://datasheet.ciiva.com/22746/1734359-22746158.pdf?src-supplier=Element14, ComponentLink2URL=https://datasheet.ciiva.com/22746/1734359-22746158.pdf?src-supplier=Element14, ComponentLink3Description="Link Digikey", ComponentLink3URL=https://www.digikey.com/en/products/detail/panasonic-electronic-components/10SVPE220M/4204777, Construction=Cylindrical, Designer=TVBac, Diameter=6.3mm, Dissipation Factor=12%, Height=5.9mm, Lead Free="Lead Free", Length=5.9mm, Life (Hours)=2000Hour, Mounting Technology="Surface Mount", Packaging="Tape and Reel", Pins=6, Pricing="1=1.66, 10=1.53, 50=1.44, 100=1.19, 1000=0.857, 10000=0.768 (USD)", Reach SVHC Compliant=No, Ripple Current (AC)=2.7A, RoHS=Yes, RoHS Compliant=Yes, Series="OS-CON™, SVPE", Stock=1969, Supplier=Mouser, Termination=SMD/SMT, Voltage Rating=10V, Voltage Rating (DC)=10V
C8 C9 C18: library part "CAP; 0.1uF; 16V; 0603; SMD; CC0603KRX7R7BB104", "0603 0.1 uF 16 V ±10 % Tolerance X7R SMT Multilayer Ceramic Capacitor", Case Code (Imperial)=0603, Case Code (Metric)=1608, Dielectric=X7R, Insulation Resistance=100GR, Manufacturer=Yageo, Manufacturer Part Number=CC0603KRX7R7BB104, Max Operating Temperature=125°C, Min Operating Temperature=-55°C, Package Quantity=1, Supplier Part Number=311-1088-1-ND, Tolerance=10%, Voltage=16V, Case/Package=0603, Category="Ceramic Capacitors", ComponentLink1Description=https://datasheet.ciiva.com/11786/0900766b80d84f1d-11786077.pdf?src-supplier=Rs, ComponentLink1URL=https://datasheet.ciiva.com/11786/0900766b80d84f1d-11786077.pdf?src-supplier=Rs, ComponentLink2Description=https://datasheet.ciiva.com/8033/70765-8033799.pdf?src-supplier=Element14, ComponentLink2URL=https://datasheet.ciiva.com/8033/70765-8033799.pdf?src-supplier=Element14, ComponentLink3Description=https://datasheet.ciiva.com/7978/1489800-7978141.pdf?src-supplier=Element14, ComponentLink3URL=https://datasheet.ciiva.com/7978/1489800-7978141.pdf?src-supplier=Element14, ComponentLink4Description=https://datasheet.ciiva.com/28450/1489800-28450552.pdf?src-supplier=Element14, ComponentLink4URL=https://datasheet.ciiva.com/28450/1489800-28450552.pdf?src-supplier=Element14, ComponentLink5Description=https://datasheet.ciiva.com/46430/1734573-46430156.pdf?src-supplier=Element14, ComponentLink5URL=https://datasheet.ciiva.com/46430/1734573-46430156.pdf?src-supplier=Element14, ComponentLink6Description=https://datasheet.ciiva.com/144/mlccorderingcode-144183.pdf?src-supplier=Digikey, ComponentLink6URL=https://datasheet.ciiva.com/144/mlccorderingcode-144183.pdf?src-supplier=Digikey, ComponentLink7Description=https://datasheet.ciiva.com/144/mlccorderingcode-144182.pdf?src-supplier=Digikey, ComponentLink7URL=https://datasheet.ciiva.com/144/mlccorderingcode-144182.pdf?src-supplier=Digikey, ComponentLink8Description=https://datasheet.ciiva.com/144/mlccorderingcode-144184.pdf?src-supplier=Digikey, ComponentLink8URL=https://datasheet.ciiva.com/144/mlccorderingcode-144184.pdf?src-supplier=Digikey, ComponentLink9Description=https://datasheet.ciiva.com/8033/1734573-8033797.pdf?src-supplier=Element14, ComponentLink9URL=https://datasheet.ciiva.com/8033/1734573-8033797.pdf?src-supplier=Element14, ComponentLink10Description=https://datasheet.ciiva.com/13395/upy-gphc-x7r-6-3v-to-50v-8-13395674.pdf?src-supplier=Mouser, ComponentLink10URL=https://datasheet.ciiva.com/13395/upy-gphc-x7r-6-3v-to-50v-8-13395674.pdf?src-supplier=Mouser, ComponentLink11Description=https://datasheet.ciiva.com/11464/upy-gphc-x7r-6-3v-to-50v-8-11464735.pdf?src-supplier=Avnet, ComponentLink11URL=https://datasheet.ciiva.com/11464/upy-gphc-x7r-6-3v-to-50v-8-11464735.pdf?src-supplier=Avnet, ComponentLink12Description=https://datasheet.ciiva.com/15165/getdatasheetpartid-63554-15165387.pdf?src-supplier=Verical, ComponentLink12URL=https://datasheet.ciiva.com/15165/getdatasheetpartid-63554-15165387.pdf?src-supplier=Verical, ComponentLink13Description="Link Digikey", ComponentLink13URL=https://www.digikey.com/en/products/detail/yageo/CC0603KRX7R7BB104/302822, Depth=0.8mm, Designer=TVBac, Halogen Free="Halogen Free", Height=0.8mm, Lead Free="Lead Free", Length=1.6mm, Material=Ceramic, Mounting Technology="Surface Mount", Packaging="Tape and Reel", Pins=2, Pricing="1=0.1, 10=0.042, 50=0.0238, 100=0.0185, 500=0.01392, 1000=0.01094, 4000=0.00915, 8000=0.00836, 12000=0.00796, 28000=0.00756, 100000=0.00547, 200000=0.00529, 400000=0.00497 (USD)", Radiation Hardening=No, Reach SVHC Compliant=No, RoHS=Yes, RoHS Compliant=Yes, Series=CC, Stock=8705780, Supplier=Digikey, Termination=SMD/SMT, Thickness=0.035inch, Voltage Rating=16V, Voltage Rating (DC)=16V, Width=0.031inch
C10 C13: library part "CAP; 22pF; 50V; SMD; CC0603FRNPO9BN220", "Multilayer Ceramic Capacitor, 22 pF, 50 V, ï¿½ 1%, C0G (NP0), 0603 [1608 Metric]", Manufacturer=Yageo, Manufacturer Part Number=CC0603FRNPO9BN220, Supplier Part Number=1000074, Category="Ceramic Capacitors", ComponentLink1Description=https://datasheet.ciiva.com/13211/upy-gp-np0-16v-to-50v-8-13211061.pdf?src-supplier=Mouser, ComponentLink1URL=https://datasheet.ciiva.com/13211/upy-gp-np0-16v-to-50v-8-13211061.pdf?src-supplier=Mouser, ComponentLink2Description="Link Digikey", ComponentLink2URL=https://www.digikey.com/en/products/detail/yageo/CC0603FRNPO9BN220/5883497, Designer=TVBac, Halogen Free=5694HalogenFree, Lead Free=5697LeadFree, Pricing="4000=0.0159, 12000=0.0156, 20000=0.0154, 80000=0.0149, 120000=0.0147 (USD)", RoHS=Yes, Stock=144000, Supplier="Future Electronics"
C11 C12 C14 C15 C16 C19: library part "CAP; 0.033uF; 33nF; 0603; 16V; C0603C333J4REC7411", "Multilayer Ceramic Capacitors MLCC - SMD/SMT 16V 0.033uF X7R 0603 5%", Manufacturer=KEMET, Manufacturer Part Number=C0603C333J4REC7411, Supplier Part Number=80-C0603C333J4RECLR, Category="Ceramic Capacitors", ComponentLink1Description=https://api.kemet.com/component-edge/download/datasheet/C0603C333J4REC7411.pdf?src-supplier=Digikey, ComponentLink1URL=https://api.kemet.com/component-edge/download/datasheet/C0603C333J4REC7411.pdf?src-supplier=Digikey, ComponentLink2Description="Link Digikey", ComponentLink2URL=https://www.digikey.com/en/products/detail/kemet/C0603C333J4REC7411/8645086, Designer=TVBac, Pricing="1=0.13, 10=0.057, 50=0.057, 100=0.033, 1000=0.025, 2500=0.022, 10000=0.02, 15000=0.018, 45000=0.017, 90000=0.014 (USD)", RoHS=Yes, Stock=17910, Supplier=Mouser
C20: library part "CAP; 10uF; 10V; 0805; C0805C106K9PACTU", "Multilayer Ceramic Capacitor, 10 uF, 6.3 V, ï¿½ 10%, X5R, 0805 [2012 Metric]", Case Code (Imperial)=0805, Case Code (Metric)=2012, Dielectric=X5R, Dielectric Material=4241ConductorMaterial, Manufacturer=KEMET, Manufacturer Part Number=C0805C106K9PACTU, Max Operating Temperature=85°C, Min Operating Temperature=-55°C, Package Quantity=3000, Supplier Part Number=80-C0805C106K9P, Tolerance=10%, Voltage Rating=6.3V, Case/Package=0805, Category="Ceramic Capacitors", ComponentLink1Description=https://datasheet.ciiva.com/7842/kem-c1006-x5r-smd-7842200.pdf?src-supplier=Element14, ComponentLink1URL=https://datasheet.ciiva.com/7842/kem-c1006-x5r-smd-7842200.pdf?src-supplier=Element14, ComponentLink2Description=https://datasheet.ciiva.com/7842/kem-c1006-x5r-smd-7842201.pdf?src-supplier=Element14, ComponentLink2URL=https://datasheet.ciiva.com/7842/kem-c1006-x5r-smd-7842201.pdf?src-supplier=Element14, ComponentLink3Description=https://datasheet.ciiva.com/18193/getdatasheetpartid-320652-18193500.pdf?src-supplier=Verical, ComponentLink3URL=https://datasheet.ciiva.com/18193/getdatasheetpartid-320652-18193500.pdf?src-supplier=Verical, ComponentLink4Description="Link Digikey", ComponentLink4URL=https://www.digikey.com/en/products/detail/kemet/C0805C106K9PAC7800/551604, Construction=Flat, Contact Material=Tin, Depth=1.25mm, Designer=TVBac, Dissipation Factor=5%, Height=1.25mm, Lead Free=5697LeadFree, Lead Pitch=0.75mm, Length=2mm, Material=4241ConductorMaterial, Mounting Technology="Surface Mount", Packaging="Tape and Reel", Pins=2, Pricing="1=0.12, 10=0.074, 50=0.074, 100=0.044, 1000=0.033, 3000=0.026, 9000=0.025, 10000=0.025, 24000=0.023, 45000=0.022, 99000=0.019 (USD)", Radiation Hardening=No, Reach SVHC Compliant=No, RoHS=Yes, RoHS Compliant=Yes, Series="SMD Comm X5R", Stock=133022, Supplier=Mouser, Termination=SMD/SMT, Voltage Rating (AC)=6.3V, Voltage Rating (DC)=6.3V, Width=1.2mm
C21 C24 C29: library part "CAP; 0.1uF; 25V; 0603; SMD; CC0603JRX7R8BB104", "Multilayer Ceramic Capacitor, 0.1 uF, 25 V, ï¿½ 5%, X7R, 0603 [1608 Metric]", Case Code (Imperial)=0603, Case Code (Metric)=1608, Dielectric=X7R, Manufacturer=Yageo, Manufacturer Part Number=CC0603JRX7R8BB104, Max Operating Temperature=125°C, Min Operating Temperature=-55°C, Supplier Part Number=311-1777-1-ND, Tolerance=5%, Voltage Rating=25V, Case/Package=0603, Category="Ceramic Capacitors", ComponentLink1Description=https://datasheet.ciiva.com/11465/upy-gphc-x7r-6-3v-to-50v-8-11465031.pdf?src-supplier=Avnet, ComponentLink1URL=https://datasheet.ciiva.com/11465/upy-gphc-x7r-6-3v-to-50v-8-11465031.pdf?src-supplier=Avnet, ComponentLink2Description="Link Digikey", ComponentLink2URL=https://www.digikey.com/en/products/detail/yageo/CC0603JRX7R8BB104/5195186, Construction=Flat, Designer=TVBac, Halogen Free="Halogen Free", Height=0.8mm, Lead Free="Lead Free", Length=1.6mm, Mounting Technology="Surface Mount", Packaging="Tape and Reel", Pricing="1=0.1, 10=0.068, 50=0.0408, 100=0.0321, 500=0.02372, 1000=0.01964, 4000=0.01672, 8000=0.01555, 12000=0.01478, 28000=0.014, 100000=0.0106, 200000=0.01034, 400000=0.00972 (USD)", RoHS=Yes, RoHS Compliant=Yes, Series=CC, Stock=449287, Supplier=Digikey, Termination=SMD/SMT, Thickness=0.035inch, Voltage Rating (DC)=25V, Weight=7.1E-05oz, Width=0.031inch
C22: library part "CAP; TH; 0.001uF; 50V; FA28NP01H102JNU06", "Capacitor Ceramic 0.001uF 50V C0G 5% 5mm T/R", Case/Package=Radial, Manufacturer=TDK, Manufacturer Part Number=FA28NP01H102JNU06, Max Operating Temperature=150°C, Min Operating Temperature=-55°C, Ratings=AEC-Q200, Supplier Part Number=445-180768-1-ND, Tolerance=5%, Voltage Rating=50V, Category="Ceramic Capacitors", ComponentLink1Description=https://product.tdk.com/info/en/catalog/datasheets/leadmlcc_halogenfree_fa150_en.pdf?src-supplier=Digikey, ComponentLink1URL=https://product.tdk.com/info/en/catalog/datasheets/leadmlcc_halogenfree_fa150_en.pdf?src-supplier=Digikey, ComponentLink2Description=https://datasheet.octopart.com/FA28NP01H102JNU06-TDK-datasheet-155378142.pdf?src-supplier=TDK, ComponentLink2URL=https://datasheet.octopart.com/FA28NP01H102JNU06-TDK-datasheet-155378142.pdf?src-supplier=TDK, ComponentLink3Description=https://datasheet.octopart.com/FA28NP01H102JNU06-TDK-datasheet-154546129.pdf?src-supplier=Farnell, ComponentLink3URL=https://datasheet.octopart.com/FA28NP01H102JNU06-TDK-datasheet-154546129.pdf?src-supplier=Farnell, ComponentLink4Description="Link Digikey", ComponentLink4URL=https://www.digikey.com/en/products/detail/tdk-corporation/FA28NP01H102JNU06/5866347, Designer=TVBac, Features="High Temperature", Height - Seated (Max)=0.217inch, Lead Pitch=0.197inch, Lead/Base Style=Kinked, Length=0.157inch, Mounting Technology="Through Hole", Packaging="Tape and Reel", Pricing="1=0.37, 10=0.22, 50=0.1588, 100=0.1398, 500=0.1073, 1000=0.09719 (USD)", RoHS Compliant=Yes, Series=FA, Stock=2260, Supplier=Digikey, Width=0.098inch
C23: library part "CAP; 220uF; 25V; SMD; EEH-ZA1E221P", "Cap Aluminum 220uF 25V 20% (8 X 10.2mm) SMD 0.027 Ohm 2300mA 5000h 105 C Embossed T/R", Case/Package=Radial, ESR (Equivalent Series Resistance)=27mR, Leakage Current=55uA, Manufacturer=Panasonic, Manufacturer Part Number=EEH-ZA1E221P, Max Operating Temperature=105°C, Min Operating Temperature=-55°C, Package Quantity=500, Ratings=AEC-Q200, Ripple Current=2.3A, Supplier Part Number=667-EEH-ZA1E221P, Tolerance=20%, Voltage=25V, Category="Polymer Capacitors", ComponentLink1Description=https://datasheet.ciiva.com/25613/0900766b81233638-25613815.pdf?src-supplier=Rs, ComponentLink1URL=https://datasheet.ciiva.com/25613/0900766b81233638-25613815.pdf?src-supplier=Rs, ComponentLink2Description=https://datasheet.ciiva.com/6301/aba0000ce136-6301615.pdf?src-supplier=Digikey, ComponentLink2URL=https://datasheet.ciiva.com/6301/aba0000ce136-6301615.pdf?src-supplier=Digikey, ComponentLink3Description=https://datasheet.ciiva.com/10327/aba0000ce136-10327230.pdf?src-supplier=Avnet, ComponentLink3URL=https://datasheet.ciiva.com/10327/aba0000ce136-10327230.pdf?src-supplier=Avnet, ComponentLink4Description=https://datasheet.ciiva.com/11677/aba0000ce136-11677614.pdf?src-supplier=Avnet, ComponentLink4URL=https://datasheet.ciiva.com/11677/aba0000ce136-11677614.pdf?src-supplier=Avnet, ComponentLink5Description=https://datasheet.ciiva.com/32372/86aba0000ce136-32372729.pdf?src-supplier=Onlinecomponents.com, ComponentLink5URL=https://datasheet.ciiva.com/32372/86aba0000ce136-32372729.pdf?src-supplier=Onlinecomponents.com, ComponentLink6Description=https://datasheet.ciiva.com/30515/70314667-30515143.pdf?src-supplier=Allied+Electronics, ComponentLink6URL=https://datasheet.ciiva.com/30515/70314667-30515143.pdf?src-supplier=Allied+Electronics, ComponentLink7Description=https://datasheet.ciiva.com/48540/eehza-eng-tds-48540965.pdf?src-supplier=Distrelec, ComponentLink7URL=https://datasheet.ciiva.com/48540/eehza-eng-tds-48540965.pdf?src-supplier=Distrelec, ComponentLink8Description=https://datasheet.ciiva.com/22730/1536543-22730550.pdf?src-supplier=Element14, ComponentLink8URL=https://datasheet.ciiva.com/22730/1536543-22730550.pdf?src-supplier=Element14, ComponentLink9Description="Link Digikey", ComponentLink9URL=https://www.digikey.com/en/products/detail/panasonic-electronic-components/EEH-ZA1E221P/3088116, Construction=Cylindrical, Designer=TVBac, Diameter=8mm, Dissipation Factor=14%, Height=10.2mm, Lead Diameter=0.9mm, Lead Free="Lead Free", Lead Pitch=3.1mm, Length=10.2mm, Life (Hours)=10000Hour, Material=Polymer, Mounting Technology="Surface Mount,PCB", Packaging="Tape and Reel", Pricing="1=1.51, 10=0.895, 50=0.895, 100=0.746, 500=0.622, 1000=0.598, 2500=0.524, 5000=0.511, 10000=0.482 (USD)", Radiation Hardening=No, Reach SVHC Compliant=No, Ripple Current (AC)=2.3A, RoHS=Yes, RoHS Compliant=Yes, Series=ZA, Stock=1873, Supplier=Mouser, Technology=HYBRID, Termination=SMD/SMT, Voltage Rating=25V, Voltage Rating (DC)=25V